# Altium PCB PCB_Altium_STM32F.PcbDoc
Units mm, origin at the board's own origin, x right, y up, seen from the top; angles counter-clockwise.
Board outline 43.76 x 38.86 mm, 4 copper layers (L1_signal, Int1 (GND), Int2 (GND, L4_signal), stack 1.57 mm thick; 38 components, 30 nets, 183 pads, 54 vias.
Unrouted connection lines stored in the file: 21.
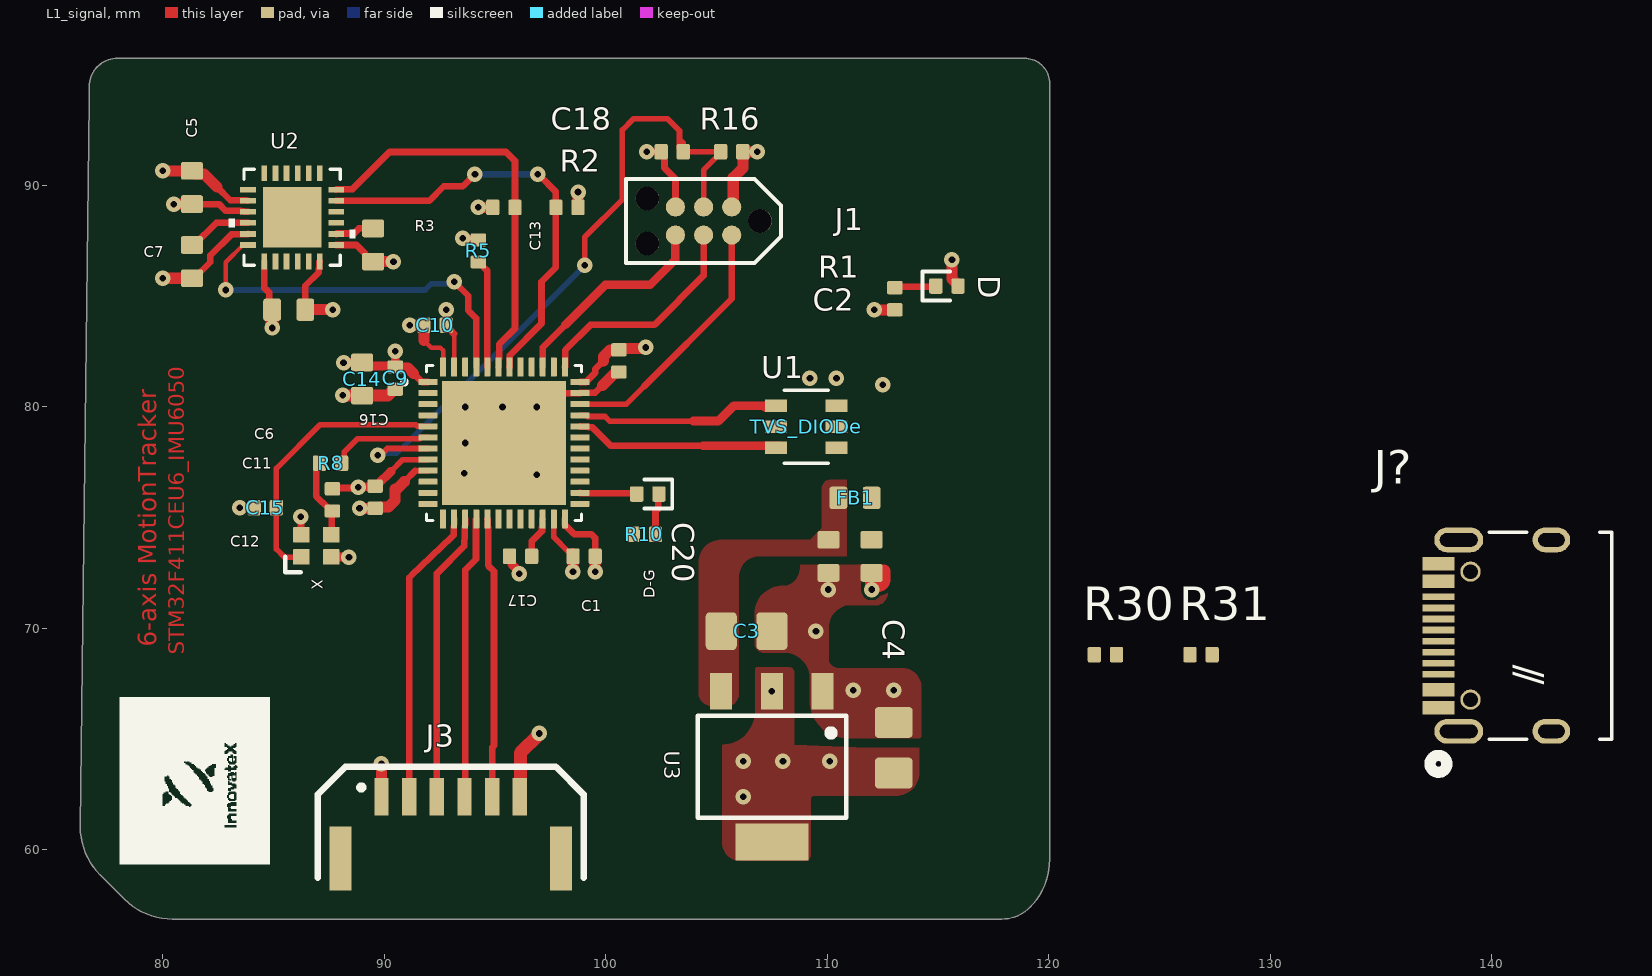
[diagram p0: L1_signal view]
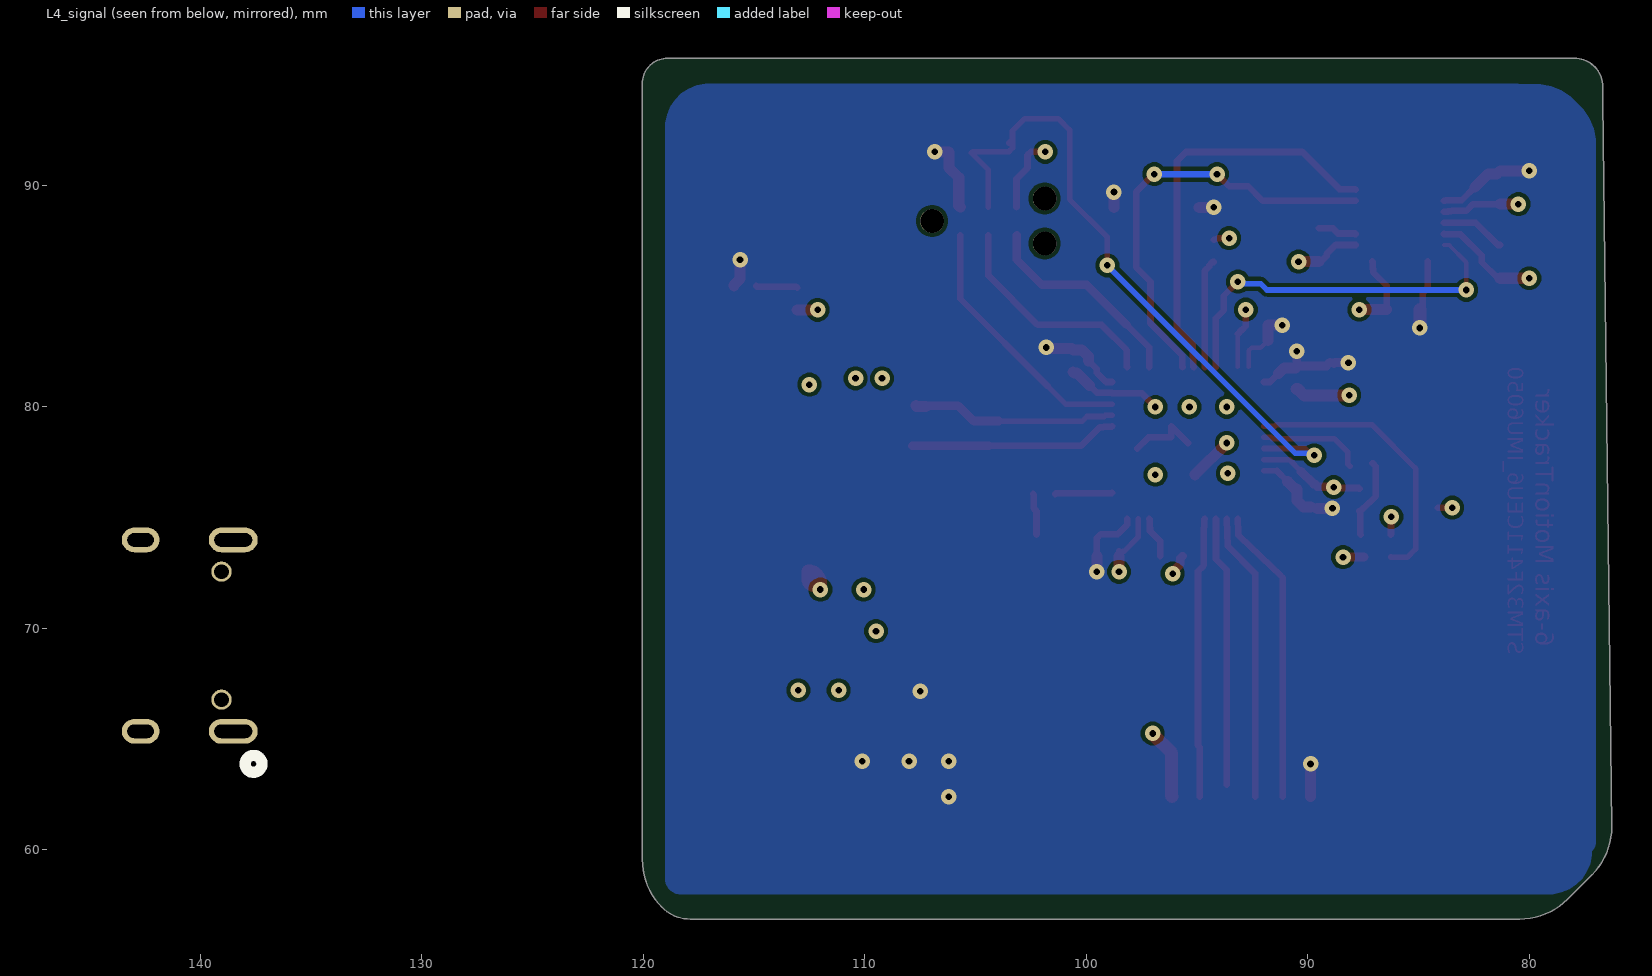
[diagram p1: L4_signal view, seen from below]
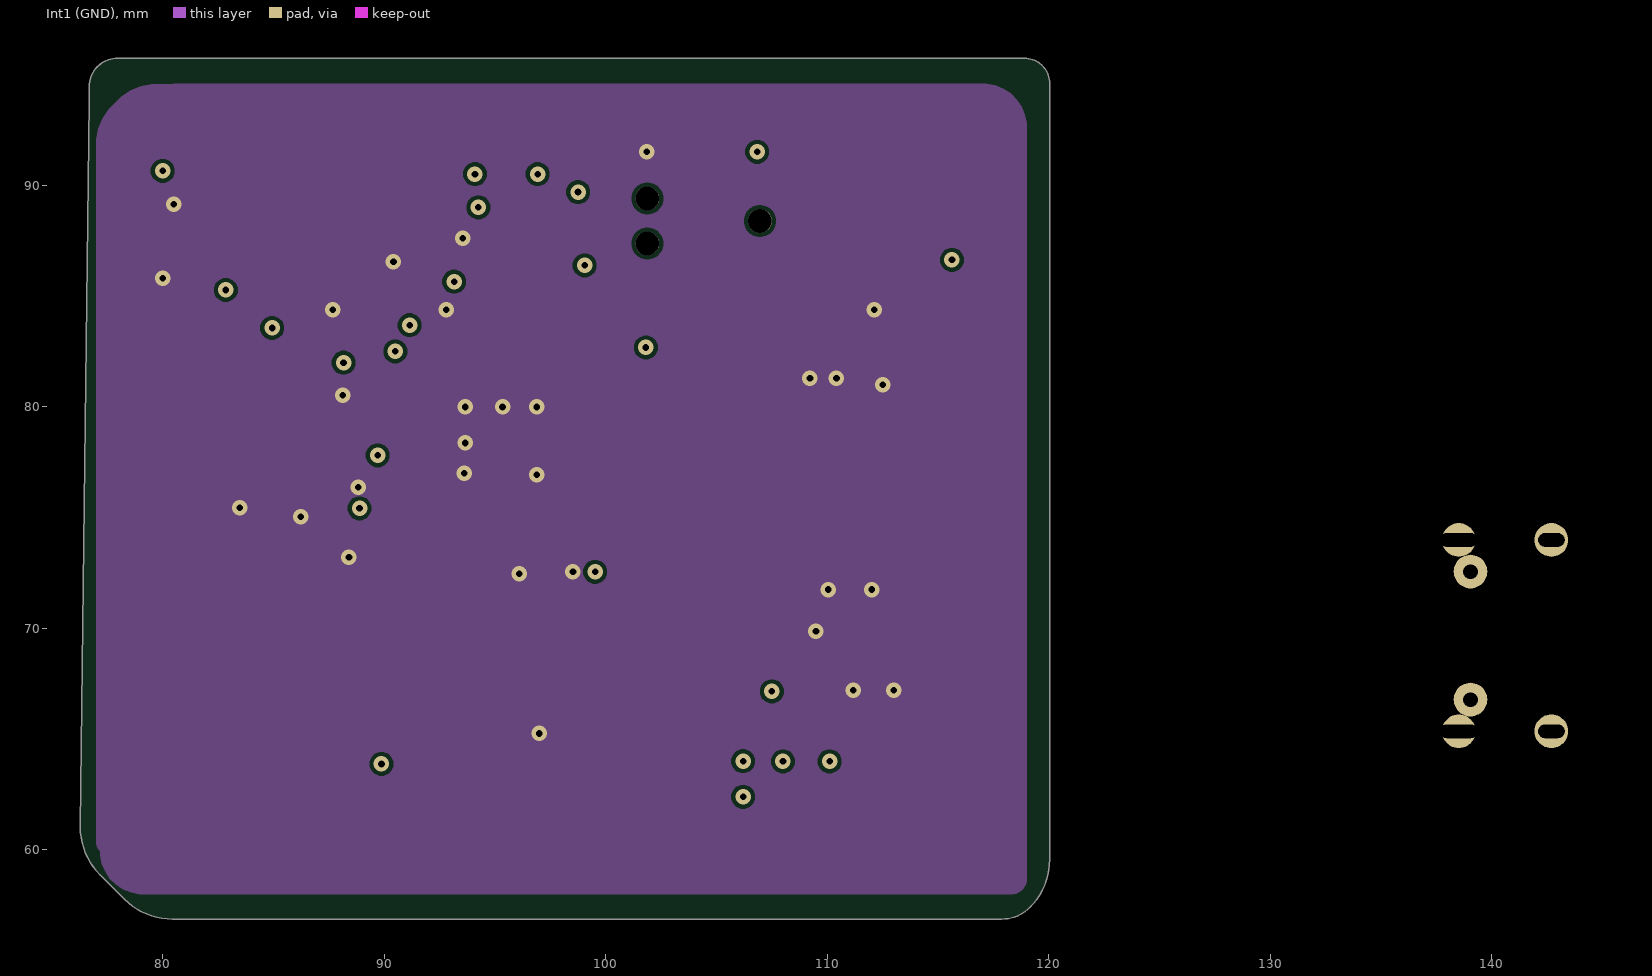
[diagram p2: Int1 (GND)]
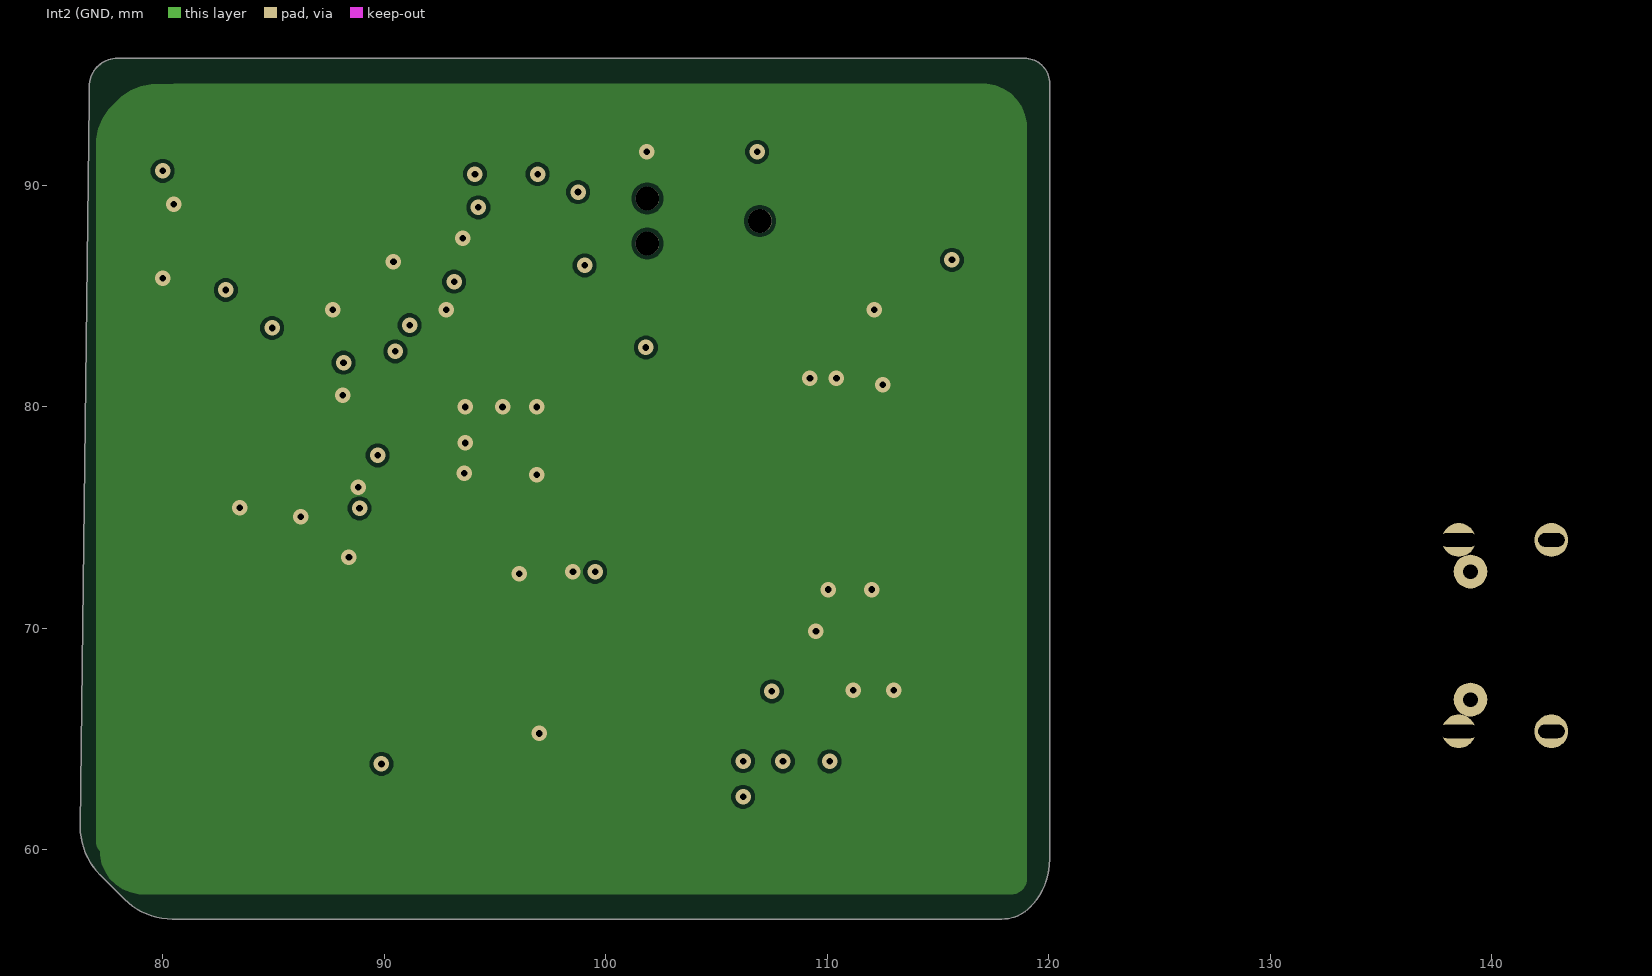
[diagram p3: Int2 (GND]
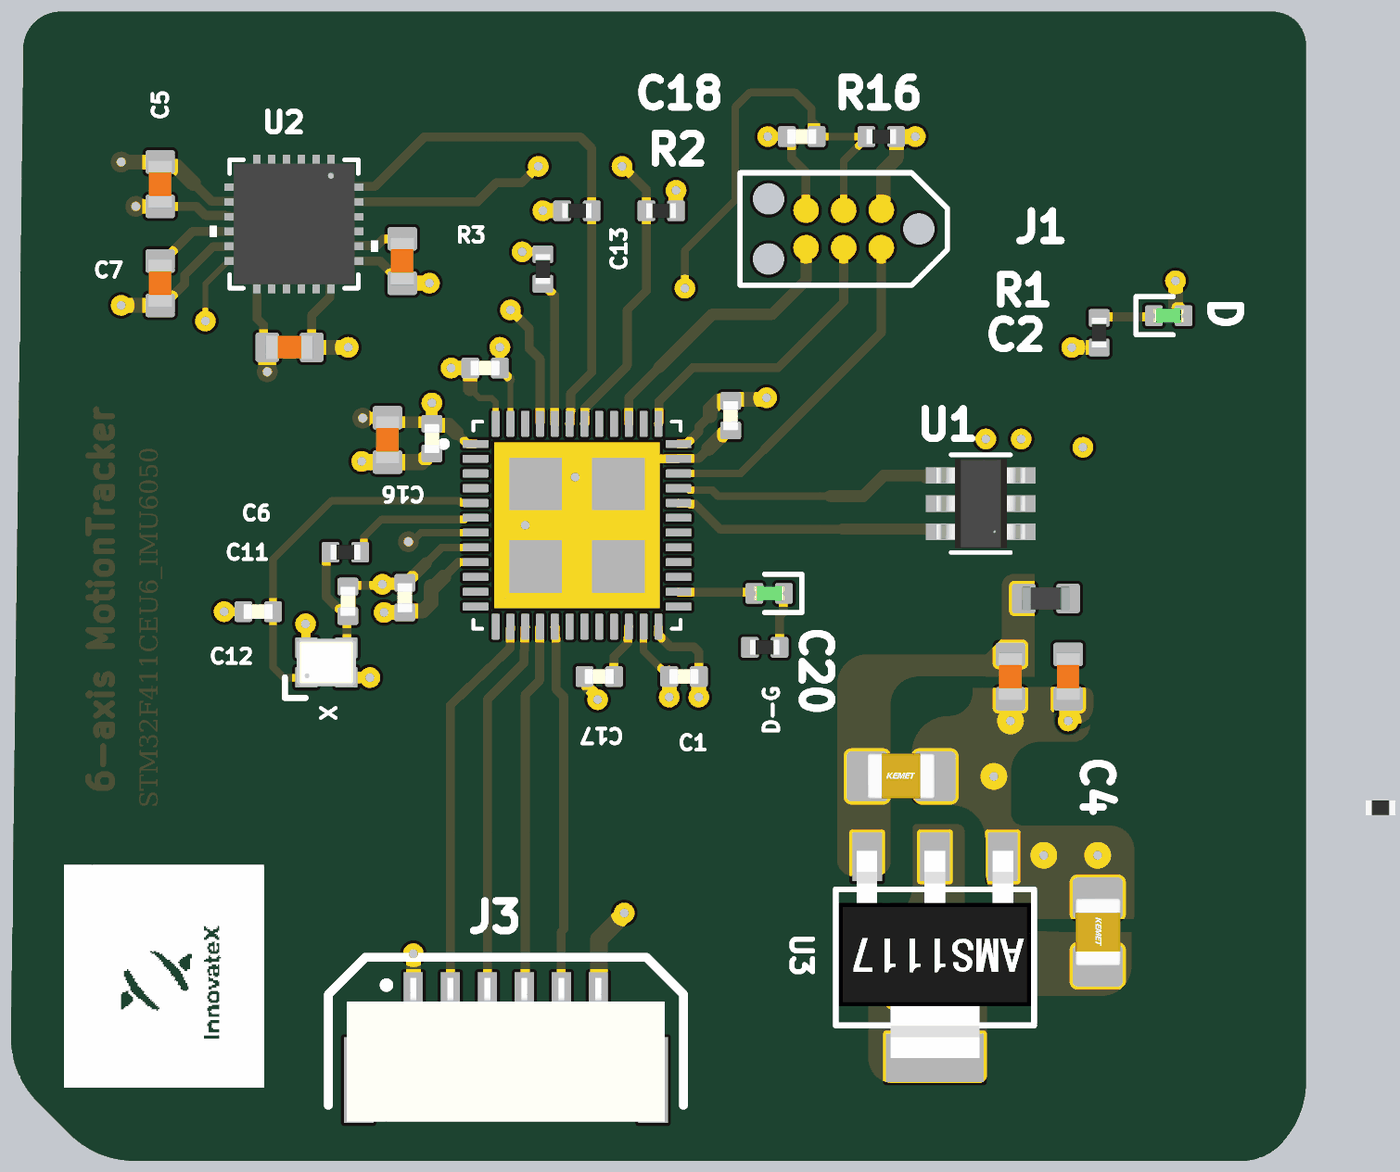
[diagram p4: 3D render of the assembled board from above, using the file's embedded part models]

## Layer stack, top to bottom
Top Solder: solder mask 0.0254, SM-001, Dk 4
L1_signal: signal copper 0.035
Dielectric 1: prepreg 0.2, PP-017, Dk 4.6
Int1 (GND): signal copper 0.0175
Dielectric 3: core 1.065, Core-039, Dk 4.6
Int2 (GND: signal copper 0.0175
Dielectric 5: prepreg 0.2, PP-017, Dk 4.6
L4_signal: signal copper 0.035
Bottom Solder: solder mask 0.0254, SM-001, Dk 4

## Board outline
77.174,58.868 78.274,57.769 ccw(c80.442,59.937) 80.442,56.871 117.876,56.871 ccw(c117.876,58.661) 119.142,57.395 ccw(c116.974,59.563) 120.04,59.563 120.04,94.59 ccw(c118.897,94.59) 118.897,95.733 78.638,95.733 77.959,95.733 ccw(c77.959,94.463) 76.689,94.463 76.689,93.828 76.276,61.036 ccw(c79.342,61.036)

## Design rules (kind name [scope] priority, off if disabled: settings)
Clearance [All] p1: gap=0.18 ignorepadtopadclearanceinfootprint=FALSE
DiffPairsRouting [All] p1: maxlimit=0.254 minlimit=0.254 mostfreqgap=0.254 toplayer_minwidth=0.381 toplayer_maxwidth=0.381 toplayer_prefwidth=0.381 midlayer1_minwidth=0.381 midlayer1_maxwidth=0.381 midlayer1_prefwidth=0.381 midlayer2_minwidth=0.381 midlayer2_maxwidth=0.381 midlayer2_prefwidth=0.381 bottomlayer_minwidth=0.381 bottomlayer_maxwidth=0.381 bottomlayer_prefwidth=0.381 maxuncoupledlength=12.7
HoleSize [IsVia] p1: absolutevalues=TRUE maxlimit=2.54 minlimit=0.025 maxpercent=80.000 minpercent=20.000
PolygonConnect [All] p1: connectstyle=Direct reliefconductorwidth=0.254 reliefentries=4 polygonreliefangle="90 Angle" airgapwidth=0.254
RoomDefinition Altium_stm_BMS_Buck_boost [InComponentClass('Altium_stm_BMS_Buck_boost')] p1: confinementstyle=ConfineIn formatcopy=TRUE lockcomponents=FALSE outline 0,0 50.8,0 50.8,25.4 0,25.4
RoomDefinition Altium_STM32_Schematic_SchDoc [InComponentClass('Altium_STM32_Schematic_SchDoc')] p2: confinementstyle=ConfineIn formatcopy=TRUE lockcomponents=FALSE outline 0,0 50.8,0 50.8,25.4 0,25.4
RoutingVias [All] p1: holewidth=0.3 width=0.7 viastyle="Through Hole" minholewidth=0.25 minwidth=0.55 maxholewidth=0.4 maxwidth=0.9
SolderMaskExpansion [All] p1: expansion=0.102 istentingtop=FALSE
UnRoutedNet [All] p1: checkbadconnections=TRUE
Width [All] p1: maxlimit=1 minlimit=0.2 preferedwidth=0.3 midlayer1_minwidth=0.254 midlayer1_maxwidth=0.254 midlayer1_prefwidth=0.254 midlayer2_minwidth=0.254 midlayer2_maxwidth=0.254 midlayer2_prefwidth=0.254 bottomlayer_minwidth=0.254 minimp=50.000000 maximp=50.000000 favimp=50.000000
27 further rules are at their usual default settings.

## Classes and differential pairs
component class Altium_stm_BMS_Buck_boost: R30 R31 U?
differential pair class USB_PORT: MCU-DIFF_USB
differential pair MCU-DIFF_USB: +MCU-DIFF_USB_P -MCU-DIFF_USB_N

## Components (designator, comment, footprint, x,y, rotation, side; value= is the part's Value field where it differs from the comment)
C1 "2.4uf" CAP_0603 112.003,73.246 r270 top
C2 "2.4uf" CAP_0603 110.052,73.246 r270 top
C3 "22uf" CAP_0805 106.357,69.87 r0 top
C4 "2.2uf" CAP_0805 113,64.607 r270 top
C5 "10nf" CAP_0603 81.319,89.898 r90 top
C6 "2.2nf" CAP_0603 89.5,87.3 r90 top
C7 "0.1uf" CAP_0603 81.319,86.55 r90 top
C9 "100np" CAP_0402 90.5,81.295 r90 top
C10 "100np" CAP_0402 92.298,83.68 r180 top
C11 "100np" CAP_0402 99.02,73.25 r0 top
C12 "100np" CAP_0402 89.585,75.915 r270 top
C13 "100np" CAP_0402 100.597,82.07 r90 top
C14 "24uf" CAP_0603 89,81.25 r90 top
C15 "100np" CAP_0402 84.63,75.444 r0 top
C16 "100np" CAP_0402 87.663,75.792 r270 top
C17 "100np" CAP_0402 96.155,73.25 r0 top
C18 "100np" CAP_0402 103,91.508 r180 top
C20 "2.2nf" CAP_0603 85.688,84.38 r180 top
D "GREEN" LED_0402_GREEN 115.4,85.45 r180 top
D-G "GREEN" LED_0402_GREEN 101.9,76.06 r0 top
FB1 "FB0603" FB_0603 111.253,75.888 r180 top
J1 "TC2030-NL" TC2030-NL-FP 104.417,88.384 r180 top
J3 "SM06B-GH  S-TB" SM06B-GHS-TB 93,61 r0 top
J? "TYPE-C-31-M-12" CONN12_C-31-M-12_HRO 137.592,66.418 r90 top
R1 "1k" RES_0402 113.05,84.875 r90 top
R2 "100k" RES_0402 98.25,89 r0 top
R3 "10k" RES_0402 95.4,89 r180 top
R5 "10k" RES_0402 94.25,87.031 r270 top
R8 "R0" RES_0402 87.578,77.454 r0 top
R10 "10k" RES_0402 101.747,74.235 r180 top
R16 "10k" RES_0402 105.687,91.508 r0 top
R30 "10k" RES_0402 122.555,68.809 r0 top
R31 "10k" RES_0402 126.873,68.809 r0 top
TVS_DIODe "USBLC6-2SC6" SOT23-6L_STM 109.049,79.095 r180 top
U1 "STM32F411CEU6" QFN50P700X700X60-49N 95.405,78.365 r0 top
U2 "MPU-6050" QFN24_4X4X0P9-0P5_TDK 85.84,88.55 r270 top
U3 "AMS1117" AMS1117 107.5,63.75 r270 top
X "32GHz" XTAL_2016 86.934,73.723 r0 top

## Footprints (in the part's own frame and the unit in brackets; to place one, negate y for a bottom-side part, rotate by r counter-clockwise, add the part's x,y. Pads: shape width x height; smd on the part's side, far side on the other; paste and mask are expansions set on the pad)
AMS1117 [mm] "SOT-223"
  rect 1.65x1 smd: 1(-3.4,2.29) 2(-3.4,0) 3(-3.4,-2.29)
  rect 1.65x3.3 smd: 2(3.4,0)
  silkscreen extent -2.3,-3.35 2.3,3.35, body extent -3.6,-3.25 3.4,3.25, height 1.87
CAP_0402 [mm]
  rrect25% 0.6x0.7 smd: 1(-0.5,0) 2(0.5,0)
  body extent -0.5,-0.26 0.5,0.26, height 0.37
CAP_0603 [mm]
  rrect25% 0.8x1 smd: 1(-0.75,0) 2(0.75,0)
  body extent -0.8,-0.4 0.8,0.4, height 0.51
CAP_0805 [mm]
  rrect25% 1.4x1.7 smd: 1(-1.143,0) 2(1.143,0)
  body extent -1.15,-0.76 1.15,0.79, height 1.01
CONN12_C-31-M-12_HRO [mil]
  oval 44x87 / inner round 60 / far side oval 44x87 hole 24 slot 67 at 90 deg paste-43.5 mask+0: 13(-42.12,-36.06) 14(298.04,-36.06)
  oval 44x67 / inner round 60 / far side oval 44x67 hole 24 slot 47 at 90 deg paste-33.5 mask+0: 15(-42.12,-200.63) 16(298.04,-200.63)
  round 36 / inner round 60 / far side round 36 hole 26 paste-18 mask-18: 17(14.18,-56.93) 18(241.74,-56.93)
  rect 24x57 smd paste-28.5 mask-28.5: A1-B12(0,0) A4-B9(31.51,0) B1-A12(255.92,0) B4-A9(224.41,0)
  rect 12x57 smd paste-28.5 mask-28.5: A5(78.75,0) A6(118.12,0) A7(137.81,0) A8(177.18,0) B5(196.87,0) B6(157.5,0) B7(98.43,0) B8(59.06,0)
  silkscreen extent -115,-308 312,15
FB_0603 [mm]
  rrect25% 0.8x1 smd: 1(-0.75,0) 2(0.75,0)
  body extent -0.8,-0.4 0.8,0.4, height 0.81
LED_0402_GREEN [mm]
  rrect25% 0.6x0.7 smd: A(-0.5,0) K(0.5,0)
  silkscreen extent -0.15,-0.65 1.1,0.65, body extent -0.51,-0.25 0.51,0.25, height 0.45
QFN24_4X4X0P9-0P5_TDK [mil]
  rect 27.81x10.03 smd paste+0 mask+0: 1(-78.41,49.22) 2(-78.41,29.54) 3(-78.41,9.85) 4(-78.41,-9.84) 5(-78.41,-29.53) 6(-78.41,-49.22) 13(78.41,-49.22) 14(78.41,-29.53) 15(78.41,-9.84) 16(78.41,9.85) 17(78.41,29.54) 18(78.41,49.22)
  rect 10.03x27.81 smd paste+0 mask+0: 7(-49.22,-78.41) 8(-29.53,-78.41) 9(-9.84,-78.41) 10(9.85,-78.41) 11(29.53,-78.41) 12(49.22,-78.41) 19(49.22,78.41) 20(29.53,78.41) 21(9.85,78.41) 22(-9.84,78.41) 23(-29.53,78.41) 24(-49.22,78.41)
  rect 108x104 smd paste+0 mask+0: 25(0,0)
  silkscreen extent -86,-112 86,112, body extent -81,-81 81,81, height 37
QFN50P700X700X60-49N [mm]
  rrect25% 0.87x0.27 smd: 1(-3.43,2.75) 2(-3.43,2.25) 3(-3.43,1.75) 4(-3.43,1.25) 5(-3.43,0.75) 6(-3.43,0.25) 7(-3.43,-0.25) 8(-3.43,-0.75) 9(-3.43,-1.25) 10(-3.43,-1.75) 11(-3.43,-2.25) 12(-3.43,-2.75) 25(3.43,-2.75) 26(3.43,-2.25) 27(3.43,-1.75) 28(3.43,-1.25) 29(3.43,-0.75) 30(3.43,-0.25) 31(3.43,0.25) 32(3.43,0.75) 33(3.43,1.25) 34(3.43,1.75) 35(3.43,2.25) 36(3.43,2.75)
  rrect25% 0.27x0.87 smd: 13(-2.75,-3.43) 14(-2.25,-3.43) 15(-1.75,-3.43) 16(-1.25,-3.43) 17(-0.75,-3.43) 18(-0.25,-3.43) 19(0.25,-3.43) 20(0.75,-3.43) 21(1.25,-3.43) 22(1.75,-3.43) 23(2.25,-3.43) 37(2.75,3.43) 38(2.25,3.43) 39(1.75,3.43) 40(1.25,3.43) 41(0.75,3.43) 42(0.25,3.43) 43(-0.25,3.43) 44(-0.75,3.43) 45(-1.25,3.43) 46(-1.75,3.43) 47(-2.25,3.43) 48(-2.75,3.43)
  rrect25% 0.27x0.87 smd paste+0: 24(2.75,-3.43)
  rect 5.6x5.6 smd paste-4: 49(0,0)
  silkscreen extent -4.6,-3.5 3.5,3.5
RES_0402 [mm]
  rrect25% 0.6x0.7 smd: 1(-0.5,0) 2(0.5,0)
  body extent -0.5,-0.25 0.5,0.25, height 0.3
SM06B-GHS-TB [mm]
  rect 0.65x1.7 smd: 1(-3.125,1.4) 2(-1.875,1.4) 3(-0.625,1.4) 4(0.625,1.4) 5(1.875,1.4) 6(3.125,1.4)
  rect 1x2.9 smd: ""(-4.975,-1.4) ""(4.975,-1.4)
  silkscreen extent -6,-2.25 6,2.75, body extent -5.38,-2.8 5.38,2.05, height 4.26
SOT23-6L_STM [mil]
  rect 38.5x22 smd paste+0 mask+0: 1(-53.75,37.4) 2(-53.75,0) 3(-53.75,-37.4) 4(53.75,-37.4) 5(53.75,0) 6(53.75,37.4)
  silkscreen extent -40,-65 40,65, body extent -59,-60 59,60, height 57
TC2030-NL-FP [mil]
  round 33.98 smd paste-16.99: 1(-50,-25) 2(-50,25) 3(0,-25) 4(0,25) 5(50,-25) 6(50,25)
  round 42.01 hole 42.01 unplated: MH(-100,0) MH(100,-40) MH(100,40)
  silkscreen extent -138,-75 138,75
XTAL_2016 [mm]
  rrect10% 0.75x0.7 smd: 1(-0.675,-0.5) 2(0.675,-0.5) 3(0.675,0.5) 4(-0.675,0.5)
  silkscreen extent -1.4,-1.2 -0.7,-0.5, body extent -1,-0.8 1,0.8, height 0.7

## Part data
C1 C2 C5 C6 C7 C14 C20: library part CAP_0603, "Capacitor SMD 0603"
C3 C4: library part CAP_0805, "Capacitor SMD 0805"
C9 C10 C11 C12 C13 C15 C16 C17 C18: library part CAP_0402, "Capacitor SMD 0402"
D D-G: library part LED_0402_GREEN, "LED 0402 GREEN SMD"
FB1: library part FB_0603, "Ferrite Bead SMD 0603"
J1: "Tag-Connect No-Solder SWD Debug Connector (No Legs) DO NOT PLACE", Manufacturer=Tag-Connect, Manufacturer Part Number=TC2030-NL-FP
J3: library part SM06B-GHS-TB, "Header Connector 6 Position 1.25MM Pitch SMD Horizontal JST GH", Manufacturer=JST, Manufacturer Part Number=SM06B-GHS-TB
J?: "Description", Manufacturer_Name="HRO Electronics", Copyright="Copyright (C) 2025 Ultra Librarian. All rights reserved.", Manufacturer_Part_Number=TYPE-C-31-M-12, RefDes=RefDes, Type=Type
R1 R2 R3 R5 R8 R10 R16 R30 R31: library part RES_0402, "Resistor SMD 0402"
TVS_DIODe: "ESD Protection for USB 2.0 High Speed", Manufacturer_Name=STMicroelectronics, Copyright="Copyright (C) 2025 Ultra Librarian. All rights reserved.", Manufacturer_Part_Number=USBLC6-2SC6, RefDes=RefDes, Type=Type
U1: "High-performance access line, ARM Cortex-M4 core with DSP and FPU, 512 Kbytes Flash, 100 MHz CPU, ART Accelerator", Package=None, Availability=Unavailable, MP=STM32F411CEU6, Price=None
U2: "Description", Manufacturer_Name=TDK, Copyright="Copyright (C) 2025 Ultra Librarian. All rights reserved.", Manufacturer_Part_Number=MPU-6050, RefDes=RefDes, Type="Motion Sensors"
U3: "IC REG LINEAR 1A SOT-89-3L", JLCPCB PN=C963410, ComponentLink1Description=Datasheet, ComponentLink1URL=http://www.advanced-monolithic.com/pdf/ds1117.pdf, Digikey PN=4518-AMS1117-3.3CT-ND
X: library part XTAL_2016, "Crystal SMD 4-Pin 2.0x1.6mm"

## Via types
v1: diameter 0.7, hole 0.3, L1_signal to L4_signal, 50 vias
v2: diameter 0.7/0.7/0.7/0.7 (per signal layer), hole 0.3, L1_signal to L4_signal, tented top, 1 vias
v3: diameter 0.7, hole 0.3, L1_signal to L4_signal, tented both sides, 1 vias
v4: diameter 0.7/0.7/0.7/0.7 (per signal layer), hole 0.3, L1_signal to L4_signal, tented both sides, 1 vias
v5: diameter 0.7/0.7/0.7/0.7 (per signal layer), hole 0.3, L1_signal to L4_signal, 1 vias

## Nets (pads, with @x,y where several pads share a name; then routed paths per layer and width w, separated by ;. In a path a pad name is that pad's centre, name@x,y a point inside that pad or via, vN(x,y) a via of type N, cw(c..) or ccw(c..) an arc to the next point about the centre after c; other vN are vias at no path point)
3V3: C4.2 C5.2 C9.2 C10.2 C11.2 C12.2 C13.2 C14.2 C20.2 D.A J1.1 J3.1 R2.2 R3.2 R16.2 U1.1 U1.9 U1.24 U1.36 U1.48 U2.8 U2.13 U3.2 | length 34
  L1_signal w0.2: 91.798,82.98 92.12,82.658 92.538,82.658 92.655,82.541 U1.48
  L1_signal w0.254: 91.405,77.115 U1.9
  L1_signal w0.3: 82.445,89.923 83.045,89.323 83.773,89.323 83.795,89.301 U2.8 ; U2.13 84.59,85.358 84.814,85.134 84.814,84.505 C20.2 ; 90.905,76.615 91.405,77.115 ; 91.32,81.5 91.705,81.115 U1.1 ; U1.24 98.155,74.665 98.57,74.25 99.344,74.25 99.52,74.074 C11.2 ; U1.36 99.105,81.115 99.52,81.53 99.52,81.693 99.897,82.07
  L1_signal w0.4: v2(88.164,81.989) 88.169,81.994 88.771,81.994 C14.2@88.822,81.943 ; C14.2 89.154,81.846 90.449,81.846 C9.2 v1(90.5,82.5)
  L1_signal w0.5: v3(80,90.648) C5.2 81.469,90.498 81.87,90.498 82.445,89.923 ; v1(88.885,75.415) C12.2 ; C12.2@89.85,75.465 90.187,75.465 90.48,75.758 90.48,76.295 90.585,76.295 90.905,76.615 ; J3.1 v1(89.875,63.875) ; C9.2 90.55,81.745 91.075,81.745 91.32,81.5 ; v1(91.148,83.68) C10.2 91.798,82.98 ; v1(94.25,89) R3.2 ; R2.2 v1(98.75,89.691) ; v1(99.52,72.55) C11.2 ; 99.897,82.07 99.897,82.277 100.19,82.57 C13.2 100.647,82.62 101.702,82.62 101.758,82.675 v1(101.812,82.675) ; J1.1 105.756,89.088 105.756,90.341 106.187,90.772 106.187,90.808 106.203,90.825 106.203,91.492 R16.2 v1(106.837,91.508) ; v1(115.63,86.63) 115.63,85.77 115.9,85.5 D.A
  L1_signal w0.6: v4(84.938,83.555) C20.2
  other v1: 106.202,62.39 108,63.989 110.106,63.989 106.202,64 107.5,67.15
+5: C2.1 C3.1 FB1.2 U3.3
cp-out: C6.2 U2.20 | length 1.8
  L1_signal w0.3: U2.20@87.862,87.8 U2.20 87.854,87.823 88.635,87.823 88.862,88.05 C6.2
GND: C1.2 C2.2 C3.2 C4.1 C5.1 C6.1 C7.1 C9.1 C10.1 C11.1 C12.1 C13.1 C14.1 C15.1 C16.1 C17.1 C18.2 C20.1 J1.5 J3.6 J?.13 J?.14 J?.15 J?.A1-B12 J?.B1-A12 R1.1 R5.1 R10.2 R30.2 R31.2 TVS_DIODe.2 U1.8 U1.23 U1.35 U1.47 U1.49 U2.1 U2.9 U2.11 U2.18 U2.19 U2.25 U3.1 X.2 X.4 | length 52.5
  L1_signal w0.2: U1.47 93.155,83.29
  L1_signal w0.254: 90.303,77.083 90.835,77.615 U1.8 ; U1.23 97.655,74.115 98.297,73.473 98.347,73.473 C11.1@98.52,73.3 ; C11.1 C11.1@98.52,73.3 ; C11.1@98.52,73.486 C11.1@98.52,73.3
  L1_signal w0.3: C7.1 81.419,85.8 82.144,86.525 82.144,86.824 83.099,87.78 83.828,87.78 U2.11 ; C5.1 82.541,89.148 82.846,88.843 83.505,88.843 83.525,88.823 83.645,88.823 83.668,88.8 U2.9 ; v1(83.48,75.444) C15.1 ; v1(86.23,75.03) 86.245,75.015 86.245,74.237 X.4 ; C20.1 86.438,85.459 87.048,86.069 87.048,86.216 87.068,86.236 87.068,86.536 U2.18 ; C16.1 87.701,76.329 88.791,76.329 v1(88.828,76.367) ; U2.19 88.75,87.3 89.15,86.9 89.15,86.8 89.4,86.55 C6.1 ; v1(92.798,84.38) C10.1 92.798,83.63 92.948,83.48 92.964,83.48 93.155,83.29 ; v1(93.55,87.61) 94.05,87.61 R5.1 ; U1.49 96.155,79.115 96.155,78.615 97.195,78.615 U1.49@97.695,78.115 ; v1(96.88,79.99) 97.505,80.615 U1.35 98.85,80.63 99.519,80.63 99.853,80.964 ; v1(101.85,91.508) C18.2 102.65,91.358 102.65,90.781 103.147,90.284 J1.5
  L1_signal w0.4: X.2@87.452,73.223 87.457,73.218 88.401,73.218 v1(88.406,73.213) ; v1(88.828,76.367) 88.852,76.391 89.561,76.391 89.685,76.515 89.735,76.515 90.285,77.065 90.303,77.083 ; C17.1 95.755,73.15 95.755,72.895 96.101,72.548 v1(96.101,72.467)
  L1_signal w0.5: v1(80,85.8) C7.1 ; v5(80.494,89.148) C5.1 ; C20.1 v1(87.675,84.38) ; v1(88.127,80.523) 88.151,80.5 v1@88.312,80.5 ; C6.1 v1(90.416,86.55) ; v1(93.655,78.365) U1.49@95.09,76.93 ; v1(98.52,72.55) C11.1 ; 99.853,80.964 100.409,81.52 100.547,81.52 C13.1 ; v1(112.125,84.375) R1.1
  L1_signal w0.55: v1@88.312,80.5 C14.1 ; C9.1 90.45,80.795 90.155,80.5 ; C14.1 90.155,80.5 ; C14.1 90.155,80.5
  L1_signal w0.6: J3.6 96.15,62.425 96.15,64.373 97,65.223 v1(97,65.25) ; v1(112.003,71.746) 112.003,72.031 cw(c112.555,72.031) 112.555,72.583 112.555,72.209 cw(c112.29,72.209) v1@112.29,71.944
  other v1: 111.178,67.201 113,67.201 109.49,69.87 110.052,71.746 96.88,76.93 93.607,76.99 93.655,79.99 95.34,79.99 112.5,81 109.22,81.28 110.414,81.28
IMU_CLK: R2.1 U1.42 U2.23 | length 19.6
  L1_signal w0.3: U2.23 92.037,89.301 92.689,89.953 93.55,89.953 v1(94.097,90.5) ; U1.42 95.67,81.81 95.67,82.327 97.1,83.757 97.1,85.645 97.75,86.295 R2.1 97.75,89.7 96.95,90.5 v1(96.926,90.5)
  L4_signal w0.3: v1(94.097,90.5) v1(96.926,90.5) v1@96.926,90.392
IMU_INT: U1.45 U2.12 | length 17.3
  L1_signal w0.2: v1(82.846,85.27) 82.846,86.524 83.623,87.3 U2.12
  L1_signal w0.3: v1(93.155,85.645) 93.79,85.01 93.79,84.35 94.155,83.985 U1.45
  L4_signal w0.254: v1(82.846,85.27) 91.84,85.27 92.13,85.56 93.07,85.56 v1(93.155,85.645)
IMU_SDA: R3.1 U1.43 U2.24 | length 18.6
  L1_signal w0.3: U2.24 87.854,89.823 88.566,89.823 90.243,91.5 95.5,91.5 95.9,91.1 R3.1 95.9,83.535 95.19,82.825 95.19,82.189 95.17,82.169 95.17,81.81 U1.43
LD_LED_A: D-G.K R10.1 | length 1.9
  L1_signal w0.3: R10.1 102.247,75.286 102.374,75.413 102.374,76.034 D-G.K
LD_LED_G: D.K R1.2 | length 1.9
  L1_signal w0.3: R1.2 113.087,85.412 114.862,85.412 D.K
LD_LED_K: D-G.A U1.26 | length 2.6
  L1_signal w0.3: U1.26 98.85,76.1 101.36,76.1 D-G.A
MCU-DIFF_USB_N: J?.A7 J?.B7 TVS_DIODe.1 TVS_DIODe.6 U1.32 | length 9.4
  L1_signal w0.3: U1.32 98.85,79.1 99.209,79.1 99.229,79.08 99.387,79.08 100.233,78.234 104.39,78.234
  L1_signal w0.381: 104.39,78.234 TVS_DIODe.6@107.867,78.234
MCU-DIFF_USB_P: J?.A6 J?.B6 TVS_DIODe.3
MCU-P4: J3.2 U1.14 | length 13.4
  L1_signal w0.3: J3.2 91.125,72.155 91.125,72.279 91.218,72.372 93.05,74.119 93.138,74.206 93.141,74.326 U1.14
MCU-P5: J3.3 U1.15 | length 13
  L1_signal w0.3: J3.3 92.375,72.47 93.607,73.702 U1.15
MCU-P6: J3.4 U1.16 | length 12.2
  L1_signal w0.3: J3.4@93.655,62.943 93.655,72.631 94.14,73.116 94.14,74.92 U1.16
MCU-P7: J3.5 U1.17 | length 12.7
  L1_signal w0.3: U1.17 94.67,74.92 94.67,74.561 94.69,74.541 94.69,72.837 94.955,72.573 94.955,64.704 94.875,64.625 J3.5
MCU_Boot0: R5.2 U1.44 | length 4.9
  L1_signal w0.3: R5.2 94.3,86.531 94.45,86.381 94.45,86.331 94.655,86.126 U1.44
MCU_IN_HSE: R8.2 U1.6 | length 4.7
  L1_signal w0.254: R8.2@88.093,77.314 88.203,77.424 88.203,77.966 88.793,78.557 91.617,78.557 91.675,78.615 U1.6
MCU_NRST: C18.1 J1.3 R16.1 U1.7 | length 30.9
  L1_signal w0.254: v1(89.705,77.807) 89.826,77.807 90.134,78.115 U1.7 ; v1(99.05,86.381) 99.05,87.662 100.75,89.362 100.75,92.5 101.25,93 102.786,93 103.327,92.459 103.327,92.07 ; 103.5,91.897 103.327,92.07 ; J1.3 104.417,90.688 105.187,91.458 105.137,91.508 C18.1 103.327,91.681 103.327,92.07
  L4_signal w0.254: v1(89.705,77.807) 89.791,77.892 90.562,77.892 v1(99.05,86.381)
MCU_OUT_HSE: C15.2 U1.5 X.1 | length 12.6
  L1_signal w0.254: X.1 86.24,73.204 85.495,73.204 85.13,73.57 85.13,75.255 85.13,77.214 87.102,79.186 91.419,79.186 91.483,79.123 91.967,79.123 U1.5
MCU_SWD_CLK: J1.4 U1.37 | length 10.2
  L1_signal w0.3: U1.37 98.17,81.81 98.17,82.555 99.31,83.695 102.194,83.695 104.417,85.917 J1.4
MCU_SWDIO: J1.2 U1.34 | length 11.7
  L1_signal w0.254: U1.34 100.929,80.115 101.734,80.92
  L1_signal w0.3: 101.734,80.92 105.687,84.873 105.687,86.466 105.687,86.484 J1.2
MCU_SWO: J1.6 U1.39 | length 9.6
  L1_signal w0.3: U1.39 97.155,82.68 98.17,83.695
  L1_signal w0.381: 98.17,83.695 99.976,85.5 102,85.5 103.147,86.647 J1.6
MCU_USB_P: TVS_DIODe.4 U1.33 | length 9.7
  L1_signal w0.254: U1.33 99.135,79.615 99.193,79.557 99.967,79.557 100.175,79.349 103.962,79.349
  L1_signal w0.4: 103.962,79.349 105.08,79.349 105.776,80.045 TVS_DIODe.4
  L1_signal w0.5: TVS_DIODe.4@107.227,80.016 107.654,80.016 TVS_DIODe.4
MCU_VCAP: C17.2 U1.22 | length 1.9
  L1_signal w0.3: C17.2 96.655,73.918 97.12,74.383 97.12,74.541 97.14,74.561 97.14,74.92 U1.22
NetC7_2: C7.2 U2.10 | length 2.9
  L1_signal w0.3: C7.2 81.419,87.3 82.419,88.3 U2.10
NetJ?_A5: J?.A5 R30.1
NetJ?_B5: J?.B5 R31.1
VBUS: C1.1 FB1.1 J?.A4-B9 J?.B4-A9 TVS_DIODe.5
X_in: C16.2 R8.1 X.3 | length 3.7
  L1_signal w0.3: R8.1 86.928,77.304 86.928,75.955 87.221,75.662 87.243,75.662 87.613,75.292 C16.2 87.636,75.265 87.636,74.25 X.3
pads on no net: J1.MH J3. J?.16 J?.17 J?.18 J?.A8 J?.B8 U1.2 U1.3 U1.4 U1.10 U1.11 U1.12 U1.13 U1.18 U1.19 U1.20 U1.21 U1.25 U1.27 U1.28 U1.29 U1.30 U1.31 U1.38 U1.40 U1.41 U1.46 U2.2 U2.3 U2.4 U2.5 U2.6 U2.7 U2.14 U2.15 U2.16 U2.17 U2.21 U2.22

## Polygon pours and split planes (outlines as drawn)
GND on L1_signal "GND_L01_P053" (solid, pour order 53): 111.476,72.899 112.185,72.899 cw(c112.185,72.351) 112.733,72.351 112.733,71.59 cw(c112.191,71.59) 112.191,71.048 111.072,71.048 ccw(c111.072,70.045) 110.069,70.045 110.069,68.621 ccw(c110.484,68.621) 110.484,68.205 113.413,68.205 cw(c113.413,67.387) 114.232,67.387 114.232,65.109 cw(c114.163,65.109) 114.163,65.04 110.917,65.04 cw(c110.917,66.752) 109.204,66.752 109.204,67.767 ccw(c108.074,67.767) 108.074,68.897 107.152,68.897 cw(c107.152,69.33) 106.719,69.33 106.719,70.656 cw(c107.976,70.656) 107.976,71.913 ccw(c107.976,72.709) 108.772,72.709 108.772,72.858
+5 on L1_signal "+5_L01_P003" (solid, pour order 3): 110.877,76.713 110.877,73.246 109.227,73.246 109.227,73.996 109.753,74.522 109.753,76.287 cw(c110.179,76.287) 110.179,76.713 110.414,76.713
+5 on L1_signal "+5_L01_P007" (solid, pour order 7): 109.227,73.996 105.214,73.996 ccw(c105.214,72.98) 104.198,72.98 104.198,67.052 ccw(c104.75,67.052) 104.75,66.5 105.5,66.5 ccw(c105.5,67) 106,67 106,72.31 cw(c106.94,72.31) 106.94,73.25 109.381,73.25 ccw(c109.381,74.746) 110.877,74.746
3V3 on L1_signal "3V3_L01_P008" (solid, pour order 8): 111.857,64.607 114.143,64.607 114.143,63.464 cw(c113.127,63.464) 113.127,62.448 109.448,62.448 ccw(c109.448,62.25) 109.25,62.25 109.25,59.75 cw(c109,59.75) 109,59.5 106.1,59.5 cw(c106.1,60.35) 105.25,60.35 105.25,64.75 ccw(c105.25,66.25) 106.75,66.25 106.75,68.152 cw(c106.848,68.152) 106.848,68.25 108.25,68.25 cw(c108.25,68) 108.5,68 108.5,64.75
3V3 on L4_signal "3V3_L04_P054" (solid, pour order 54): 77.174,59.937 ccw(c79.111,59.937) 79.111,58 118.339,58 ccw(c118.339,58.661) 119,58.661 119,92.59 ccw(c117,92.59) 117,94.59 80.519,94.59 ccw(c80.519,94.564) 80.494,94.564 79.738,94.564 ccw(c79.738,92.049) 77.959,93.828 77.744,93.612 ccw(c79.54,91.816) 77,91.816 77,60.357 ccw(c77.595,60.357)
GND on Int2 (GND "GND_L03_P030" (solid, pour order 30): 77.174,59.937 ccw(c79.111,59.937) 79.111,58 118.339,58 ccw(c118.339,58.661) 119,58.661 119,92.59 ccw(c117,92.59) 117,94.59 80.519,94.59 ccw(c80.519,94.564) 80.494,94.564 79.738,94.564 ccw(c79.738,92.049) 77.959,93.828 77.744,93.612 ccw(c79.54,91.816) 77,91.816 77,60.357 ccw(c77.595,60.357)
GND on Int1 (GND) "GND_L02_P021" (solid, pour order 21): 77.174,59.937 ccw(c79.111,59.937) 79.111,58 118.339,58 ccw(c118.339,58.661) 119,58.661 119,92.59 ccw(c117,92.59) 117,94.59 80.519,94.59 ccw(c80.519,94.564) 80.494,94.564 79.738,94.564 ccw(c79.738,92.049) 77.959,93.828 77.744,93.612 ccw(c79.54,91.816) 77,91.816 77,60.357 ccw(c77.595,60.357)

## Other copper
L1_signal:
  text "6-axis MotionTracker" at 79.705,69.164 h0.8 r90
  text "STM32F411CEU6_IMU6050" at 81.229,68.809 h1.2 r90

## Silkscreen, mask and mechanical layers (free items; w line width, h text height)
Top Overlay:
  region: 83.009,64.024 83.009,64.128 83.113,64.128 83.113,63.972 83.061,63.972 83.061,64.024
  region: 83.113,62.515 83.217,62.515 83.217,62.307 83.061,62.307 83.061,62.359 83.009,62.359 83.009,62.463 83.061,62.463 83.061,62.515
  region: 83.165,63.244 83.165,63.348 83.269,63.348 83.269,63.244 83.217,63.244
  region: 7 vertices and 13 holes, not listed, extent 78.067,59.342 84.83,66.885
Mechanical 1:
  lines w0.254: 76.276,61.036 ccw(c79.342,61.036) 77.174,58.868 78.274,57.769 ccw(c80.442,59.937) 80.442,56.871 117.876,56.871 ccw(c117.876,58.661) 119.142,57.395 ccw(c116.974,59.563) 120.04,59.563 120.04,62.027 120.04,94.59 ccw(c118.897,94.59) 118.897,95.733 78.638,95.733 78.594,95.733 ccw(c78.594,93.828) 76.689,93.828 76.276,61.036

## Text inside footprints (layer, text, board x,y; h text height)
D: Mechanical 13 "+" at 117.283,84.942 h0.5 r180
D-G: Mechanical 13 "+" at 100.017,76.568 h0.5
J?: Top Overlay "/" at 142.202,67.446 h1.27 r90; Top Overlay "/" at 142.202,67.763 h1.27 r90
TVS_DIODe: Mechanical 13 "*" at 109.861,78.918 h1.27 r180
U2: Mechanical 13 "*" at 86.455,89.719 h1.27 r270